# Altium PCB Notch-Filter-1.PcbDoc
Units mm, origin at the board's own origin, x right, y up, seen from the top; angles counter-clockwise.
Board outline 59 x 55 mm, 2 copper layers (Top Layer, Bottom Layer); 32 components, 15 nets, 78 pads, 0 vias.
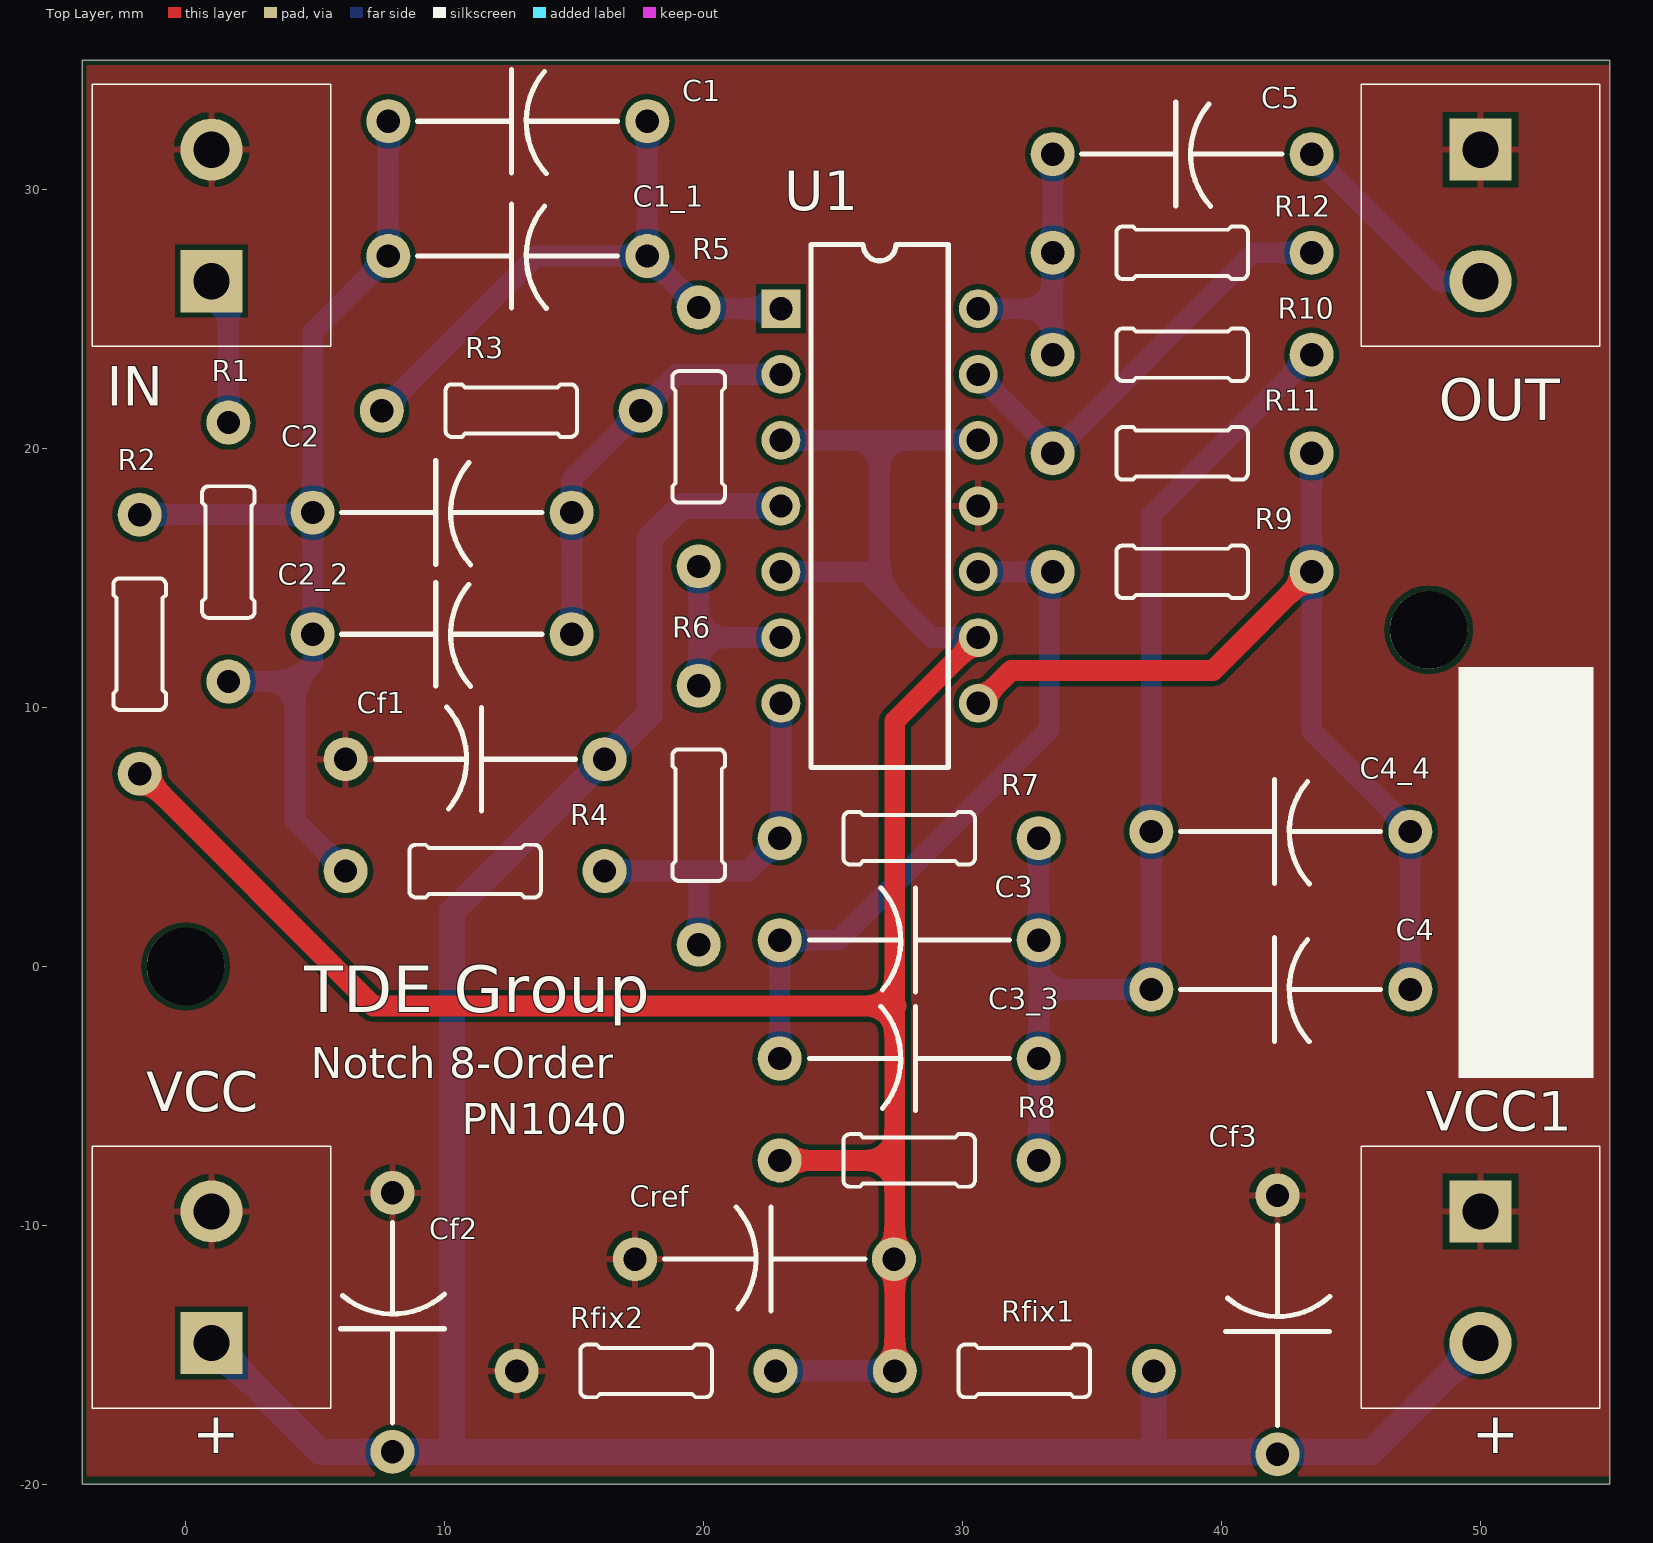
[diagram p0: Top Layer view]
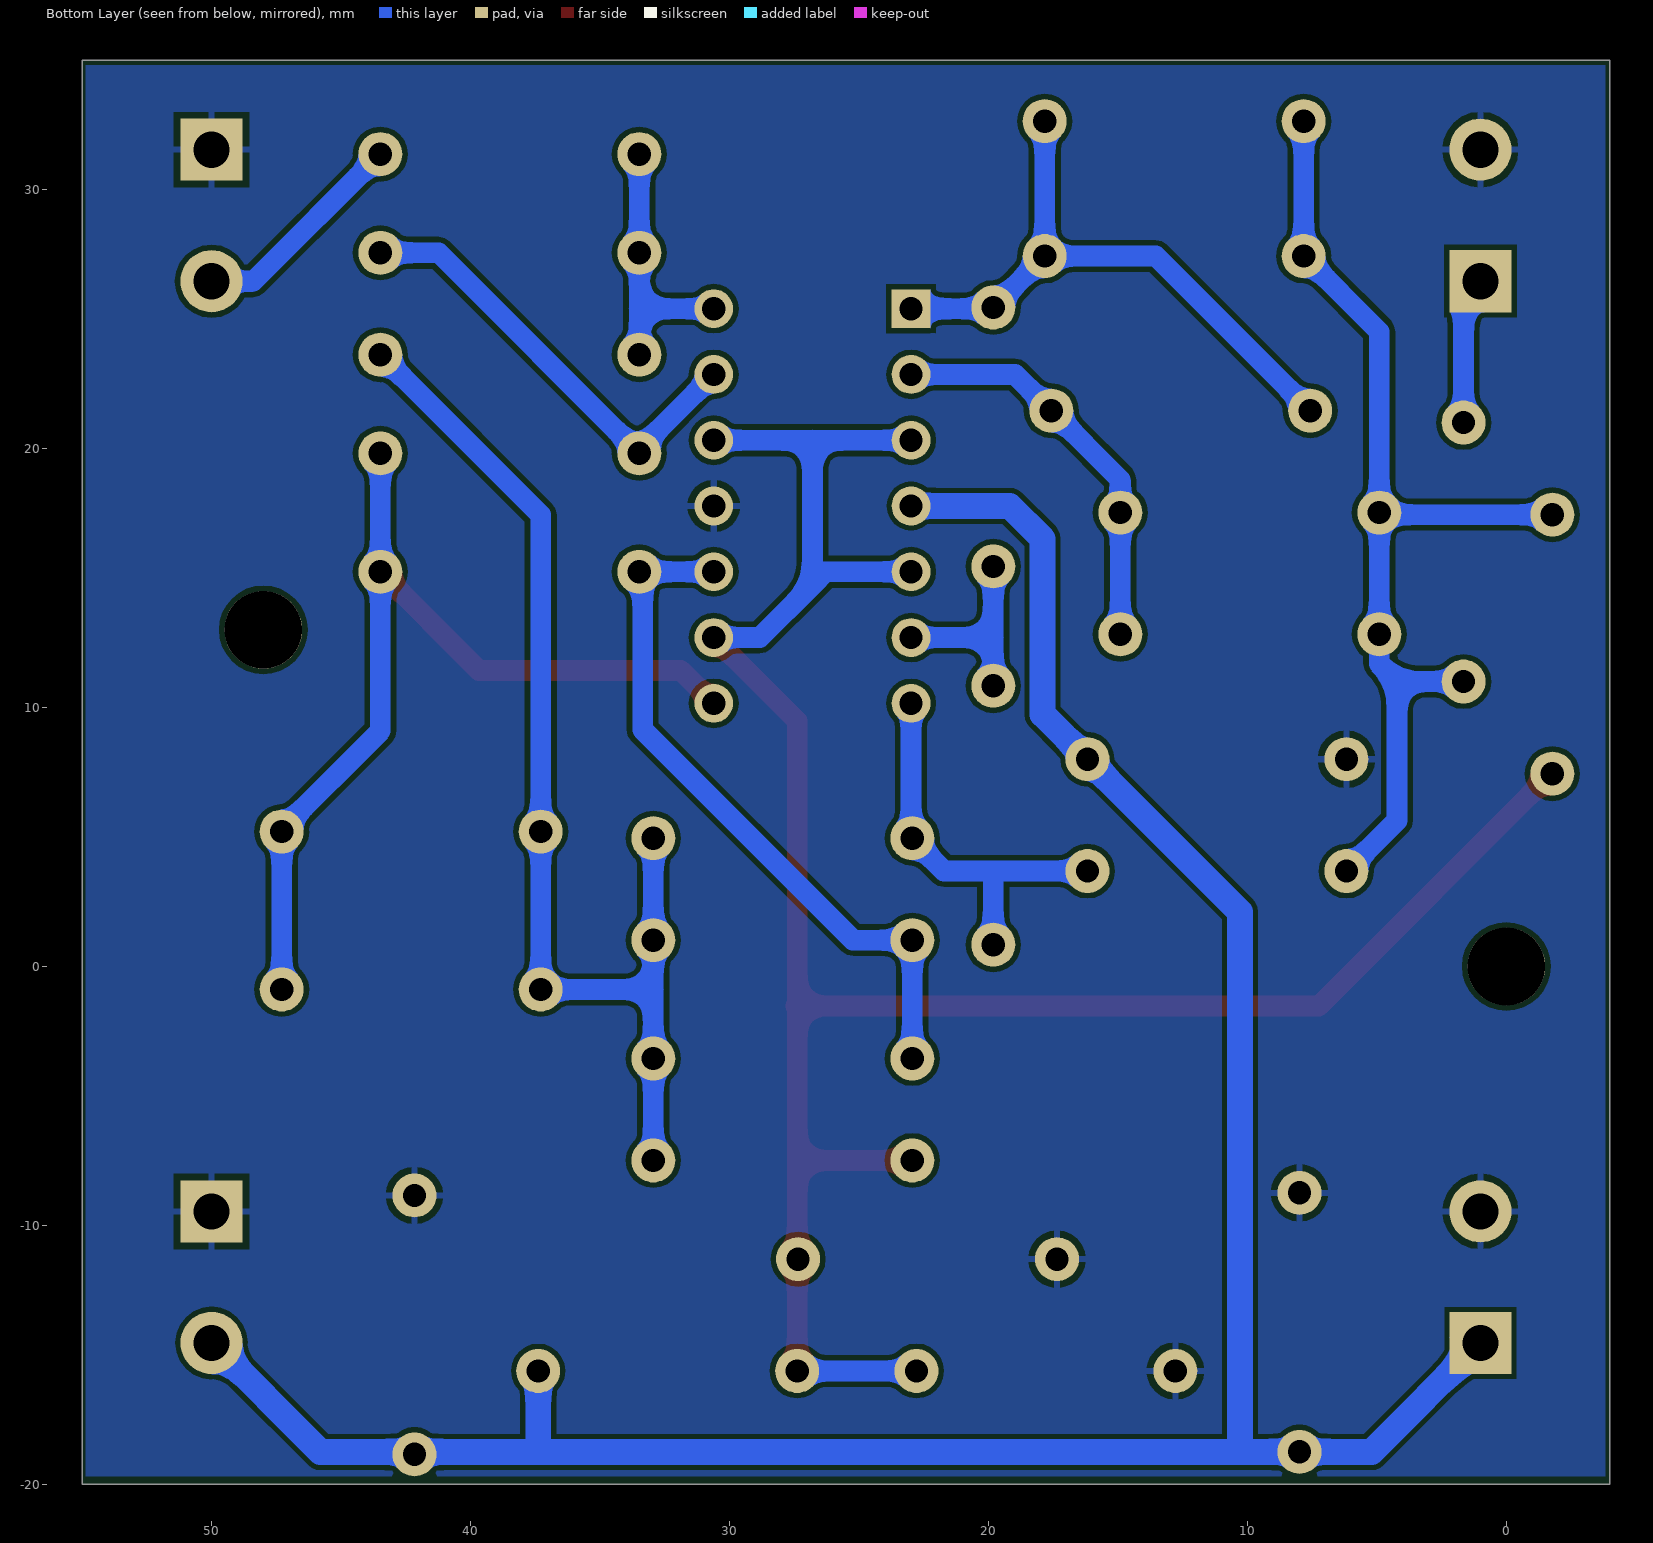
[diagram p1: Bottom Layer view, seen from below]

## Layer stack, top to bottom
Top Solder: solder mask 0.0102, Solder Resist, Dk 3.5
Top Layer: signal copper 0.0356
Dielectric 1: dielectric 0.32, FR-4, Dk 4.8
Bottom Layer: signal copper 0.0356
Bottom Solder: solder mask 0.0102, Solder Resist, Dk 3.5

## Board outline
-4,-20 -4,35 55,35 55,-20

## Design rules (kind name [scope] priority, off if disabled: settings)
Clearance [All] p1: gap=0.2
HoleSize [All] p1: absolutevalues=TRUE maxlimit=5 minlimit=0.025 maxpercent=80.000 minpercent=20.000
PolygonConnect [All] p1: connectstyle=Relief reliefconductorwidth=0.254 reliefentries=4 polygonreliefangle="90 Angle" airgapwidth=0.254
RoomDefinition Notch-Filter-1 [InComponentClass('Notch-Filter-1')] p1: confinementstyle=ConfineIn formatcopy=TRUE lockcomponents=FALSE outline -7.62,-27.432 62.484,-27.432 62.484,35.56 -7.62,35.56
RoutingVias [All] p1: holewidth=0.711 width=1.27 viastyle="Through Hole" minholewidth=0.711 minwidth=1.27 maxholewidth=0.711 maxwidth=1.27
SilkToSolderMaskClearance [IsPad] p1: minsilkscreentomaskgap=0.1 clearancetoexposedcopper=TRUE
SolderMaskExpansion [All] p1: expansion=0.102
Width [All] p1: maxlimit=5 minlimit=0.254 preferedwidth=0.8
28 further rules are at their usual default settings.

## Components (designator, comment, footprint, x,y, rotation, side; value= is the part's Value field where it differs from the comment)
C1 "Capacitor-Dummy-THT" Dummy-10mm 12.827,32.639 r0 top
C1_1 "Capacitor-Dummy-THT" Dummy-10mm 12.827,27.432 r0 top
C2 "Capacitor-Dummy-THT" Dummy-10mm 9.906,17.526 r0 top
C2_2 "Capacitor-Dummy-THT" Dummy-10mm 9.906,12.827 r0 top
C3 "Capacitor-Dummy-THT" Dummy-10mm 27.94,1.016 r180 top
C3_3 "Capacitor-Dummy-THT" Dummy-10mm 27.94,-3.556 r180 top
C4 "Capacitor-Dummy-THT" Dummy-10mm 42.291,-0.889 r0 top
C4_4 "Capacitor-Dummy-THT" Dummy-10mm 42.291,5.207 r0 top
C5 "Capacitor-Dummy-THT" Dummy-10mm 38.481,31.369 r0 top
Cf1 "Capacitor-Dummy-THT" Dummy-10mm 11.176,8.001 r180 top
Cf2 "Capacitor-Dummy-THT" Dummy-10mm 7.987,-13.745 r90 top
Cf3 "Capacitor-Dummy-THT" Dummy-10mm 42.164,-13.843 r90 top
Cref "Capacitor-Dummy-THT" Dummy-10mm 22.352,-11.303 r180 top
IN "PHOENIX_1715721" Phoenix-2-5_08 1,29 r90 top
OUT "PHOENIX_1715721" Phoenix-2-5_08 50,29 r270 top
R1 "Resistor-Dummy-THT" Dummy-10mm 1.651,16.002 r90 top
R2 "Resistor-Dummy-THT" Dummy-10mm -1.778,12.446 r90 top
R3 "Resistor-Dummy-THT" Dummy-10mm 12.573,21.463 r180 top
R4 "Resistor-Dummy-THT" Dummy-10mm 11.176,3.683 r180 top
R5 "Resistor-Dummy-THT" Dummy-10mm 19.812,20.447 r270 top
R6 "Resistor-Dummy-THT" Dummy-10mm 19.812,5.842 r270 top
R7 "Resistor-Dummy-THT" Dummy-10mm 27.94,4.953 r180 top
R8 "Resistor-Dummy-THT" Dummy-10mm 27.94,-7.493 r0 top
R9 "Resistor-Dummy-THT" Dummy-10mm 38.481,15.24 r180 top
R10 "Resistor-Dummy-THT" Dummy-10mm 38.481,23.622 r0 top
R11 "Resistor-Dummy-THT" Dummy-10mm 38.481,19.812 r0 top
R12 "Resistor-Dummy-THT" Dummy-10mm 38.481,27.559 r0 top
Rfix1 "Resistor-Dummy-THT" Dummy-10mm 32.385,-15.621 r0 top
Rfix2 "Resistor-Dummy-THT" Dummy-10mm 17.78,-15.621 r0 top
U1 "TLC2274IN" DIP-14 26.797,17.78 r270 top
VCC "PHOENIX_1715721" Phoenix-2-5_08 1,-12 r90 top
VCC1 "PHOENIX_1715721" Phoenix-2-5_08 50,-12 r270 top

## Footprints (in the part's own frame and the unit in brackets; to place one, negate y for a bottom-side part, rotate by r counter-clockwise, add the part's x,y. Pads: shape width x height; smd on the part's side, far side on the other; paste and mask are expansions set on the pad)
DIP-14 [mm] "DIP; 14 Leads; Row Spacing 7.62 mm; Pitch 2.54 mm"
  rect 1.5x1.5 hole 0.9: 1(-7.62,-3.81)
  round 1.5 hole 0.9: 2(-5.08,-3.81) 3(-2.54,-3.81) 4(0,-3.81) 5(2.54,-3.81) 6(5.08,-3.81) 7(7.62,-3.81) 8(7.62,3.81) 9(5.08,3.81) 10(2.54,3.81) 11(0,3.81) 12(-2.54,3.81) 13(-5.08,3.81) 14(-7.62,3.81)
  silkscreen extent -10.1,-2.65 10.1,2.65, body extent -10.02,-2.6 10.09,2.7, height 3
Dummy-10mm [mm] "Dummy-10mm"
  round 1.7 hole 0.9: 1(-5,0) 2(5,0)
  silkscreen extent -3.88,-2.01 3.85,2, body extent -2.39,-0.88 2.41,0.88, height 1.87
Phoenix-2-5_08 [mm] "Phoenix, 1715721"
  rect 2.4x2.4 hole 1.4: 1(-2.54,0)
  round 2.4 hole 1.4: 2(2.54,0)
  silkscreen extent -5.06,-4.6 5.06,4.6, body extent -5.05,-5.19 5.85,4.61, height 14.2

## Part data
IN OUT VCC VCC1: library part 2Pol_1715721, "Phoenix, 2 pol, 5.08mm, 22A, 715721"
U1: "Reel to Reel  quad OP"

## Free pads (board coordinates)
  round 3 hole 3 unplated: NDK(0,0) NDK(48,13)

## Nets (pads, with @x,y where several pads share a name; then routed paths per layer and width w, separated by ;. In a path a pad name is that pad's centre, name@x,y a point inside that pad or via, vN(x,y) a via of type N, cw(c..) or ccw(c..) an arc to the next point about the centre after c; other vN are vias at no path point)
GND: Cf1.2 Cf2.2 Cf3.2 Cref.2 IN.2 OUT.1 Rfix2.1 U1.11 VCC1.1 VCC.2
NetC1_1: C1.1 C1_1.1 C2.1 C2_2.1 R1.1 R2.2 R4.2 | length 40.5
  Bottom Layer w0.8: R2.2 C2.1@4.906,17.446 ; R1.1 4.224,11.002 ; R4.2 4.224,5.635 4.224,11.002 ; C1.1 C1_1.1 4.906,24.511 C2.1 C2.1@4.906,17.446 ; 4.224,11.002 4.906,11.684 C2_2.1 C2.1@4.906,17.446
NetC1_2: C1.2 C1_1.2 R3.2 R5.1 U1.1 | length 23.9
  Top Layer w0.8: R5.1 R5.1@19.859,25.4
  Bottom Layer w0.8: R3.2 13.542,27.432 C1_1.2 ; C1.2 C1_1.2 ; R5.1 C1_1.2 ; R5.1@19.859,25.4 U1.1
NetC2_2: C2.2 C2_2.2 R3.1 U1.2 | length 15.7
  Bottom Layer w0.8: C2_2.2 C2.2 14.906,18.796 R3.1 18.97,22.86 U1.2
NetC3_1: C3.1 C3_3.1 C4.1 C4_4.1 R7.1 R8.2 R10.2 | length 43.9
  Bottom Layer w0.8: R8.2 C3_3.1 32.94,-0.889 ; R7.1 C3.1 32.94,-0.889 ; R10.2 37.291,17.432 C4_4.1 C4.1 32.94,-0.889
NetC3_2: C3.2 C3_3.2 R9.2 U1.10 | length 27.4
  Bottom Layer w0.8: C3_3.2 C3.2 25.226,1.016 33.354,9.144 33.354,15.113 R9.2 U1.10
NetC4_2: C4.2 C4_4.2 R9.1 R11.2 U1.8 | length 37.2
  Top Layer w0.8: U1.8 31.877,11.43 39.671,11.43 R9.1
  Bottom Layer w0.8: R11.2 R9.1 43.481,9.097 C4_4.2@47.291,5.287 ; C4.2 C4_4.2
NetC5_1: C5.1 R10.1 R12.1 U1.14 | length 10.6
  Bottom Layer w0.8: U1.14 33.481,25.4 ; R10.1 33.481,25.4 ; C5.1 33.481,25.4
NetC5_2: C5.2 OUT.2 | length 8.6
  Bottom Layer w0.8: C5.2 48.39,26.46 OUT.2
NetIN_1: IN.1 R1.2 | length 5.7
  Bottom Layer w0.8: IN.1 1.651,25.809 R1.2
NetR4_1: R4.1 R6.2 R7.2 U1.7 | length 15.4
  Bottom Layer w0.8: R4.1 19.685,3.683 ; R6.2 19.812,3.556 19.685,3.683 ; U1.7 22.987,4.953 21.717,3.683 19.685,3.683
NetR5_2: R5.2 R6.1 U1.6 | length 7.8
  Bottom Layer w0.8: R6.1 R5.2 ; 19.812,12.7 U1.6
NetR11_1: R11.1 R12.2 U1.13 | length 17.4
  Bottom Layer w0.8: U1.13 33.481,19.986 R11.1 41.228,27.559 R12.2
VCC: Cf1.1 Cf2.1 Cf3.1 Rfix1.2 U1.4 VCC1.2 VCC.1 | length 99.5
  Bottom Layer w1: VCC.1 5.205,-18.745 Cf2.1 45.795,-18.745 VCC1.2 ; 10.287,-18.669 10.287,2.112 Cf1.1 17.907,9.732 17.907,16.51 19.177,17.78 U1.4 ; 37.385,-18.665 Rfix1.2
VREF: Cref.1 R2.1 R8.1 Rfix1.1 Rfix2.2 U1.3 U1.5 U1.9 U1.12 | length 93.5
  Top Layer w0.8: R2.1 -1.731,7.446 7.239,-1.524 27.432,-1.524 ; R8.1 27.385,-7.493 ; Rfix1.1 27.385,-7.493 ; U1.9 27.385,9.478 27.385,-7.493
  Bottom Layer w0.8: Rfix2.2 Rfix1.1 ; U1.5 26.289,15.24 26.797,14.732 ; U1.3 26.797,20.32 ; U1.9 28.829,12.7 26.797,14.732 ; U1.12 26.797,20.32 ; 26.797,14.732 26.797,20.32

## Polygon pours and split planes (outlines as drawn)
GND on Bottom Layer "GND" (solid, pour order 0): -3.81,-19.685 54.864,-19.685 54.864,34.798 -3.81,34.798
GND on Top Layer "GND" (solid, pour order 2): -3.81,-19.685 55,-19.685 55,34.798 -3.81,34.798

## Silkscreen, mask and mechanical layers (free items; w line width, h text height)
Top Overlay:
  rectangle: 49.149,-4.318 54.356,11.557
  text "TDE Group" at 4.572,-1.778 h1.8
  text "Notch 8-Order" at 4.826,-4.318 h1.2
  text "PN1040" at 10.668,-6.477 h1.2
  text "+" at 0.254,-18.796 h1.6
  text "+" at 49.657,-18.796 h1.6
Outline:
  the board outline again, w0.1

## Dimensions
55,-20 to 55,35 on Mechanical 16
-4,-20 to 55,-20 on Mechanical 16